# EAGLE board client_pcb_board (EAGLE 9.6.2)
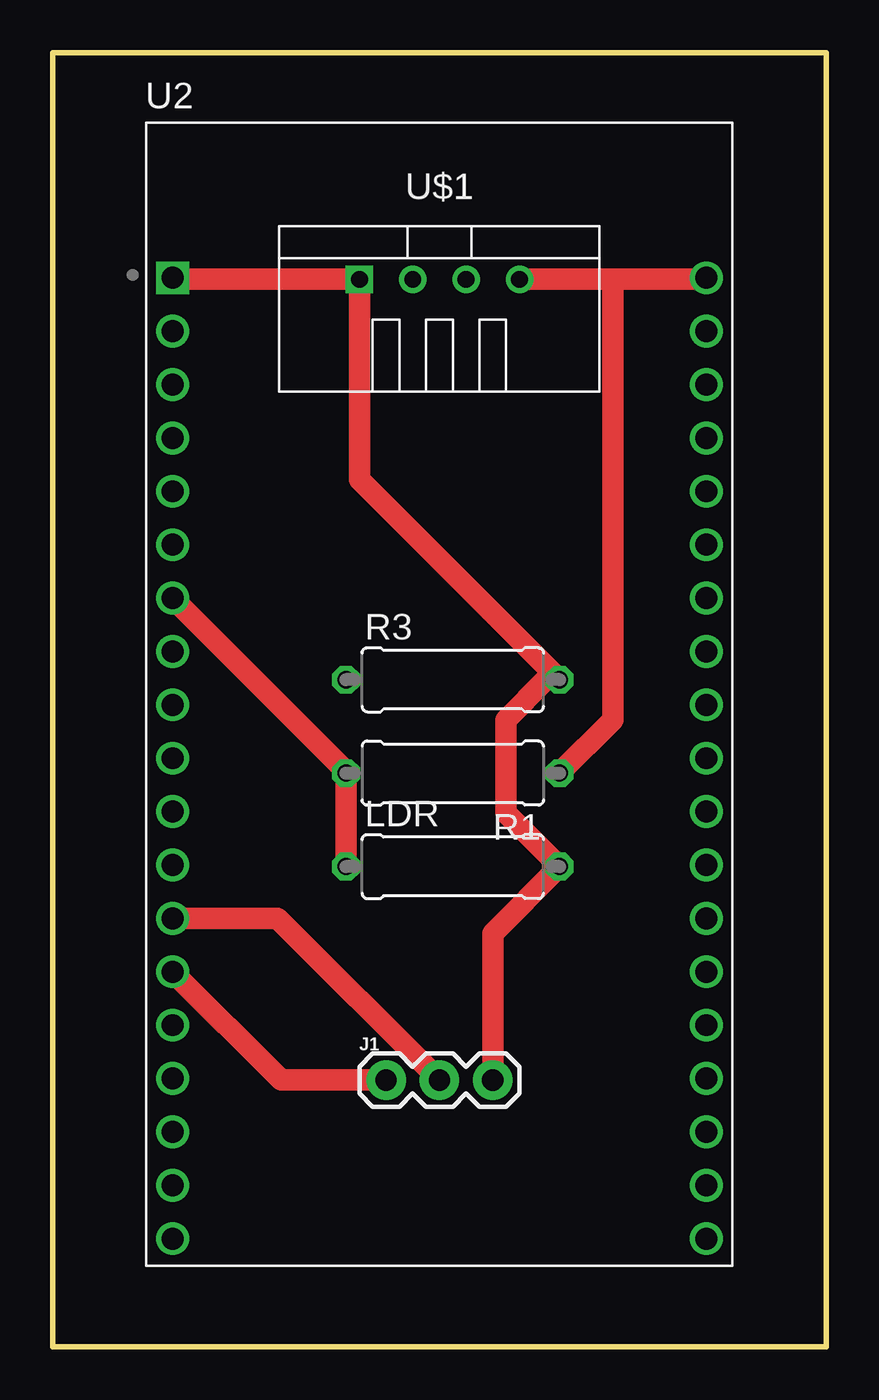
[diagram p0: board, top side]
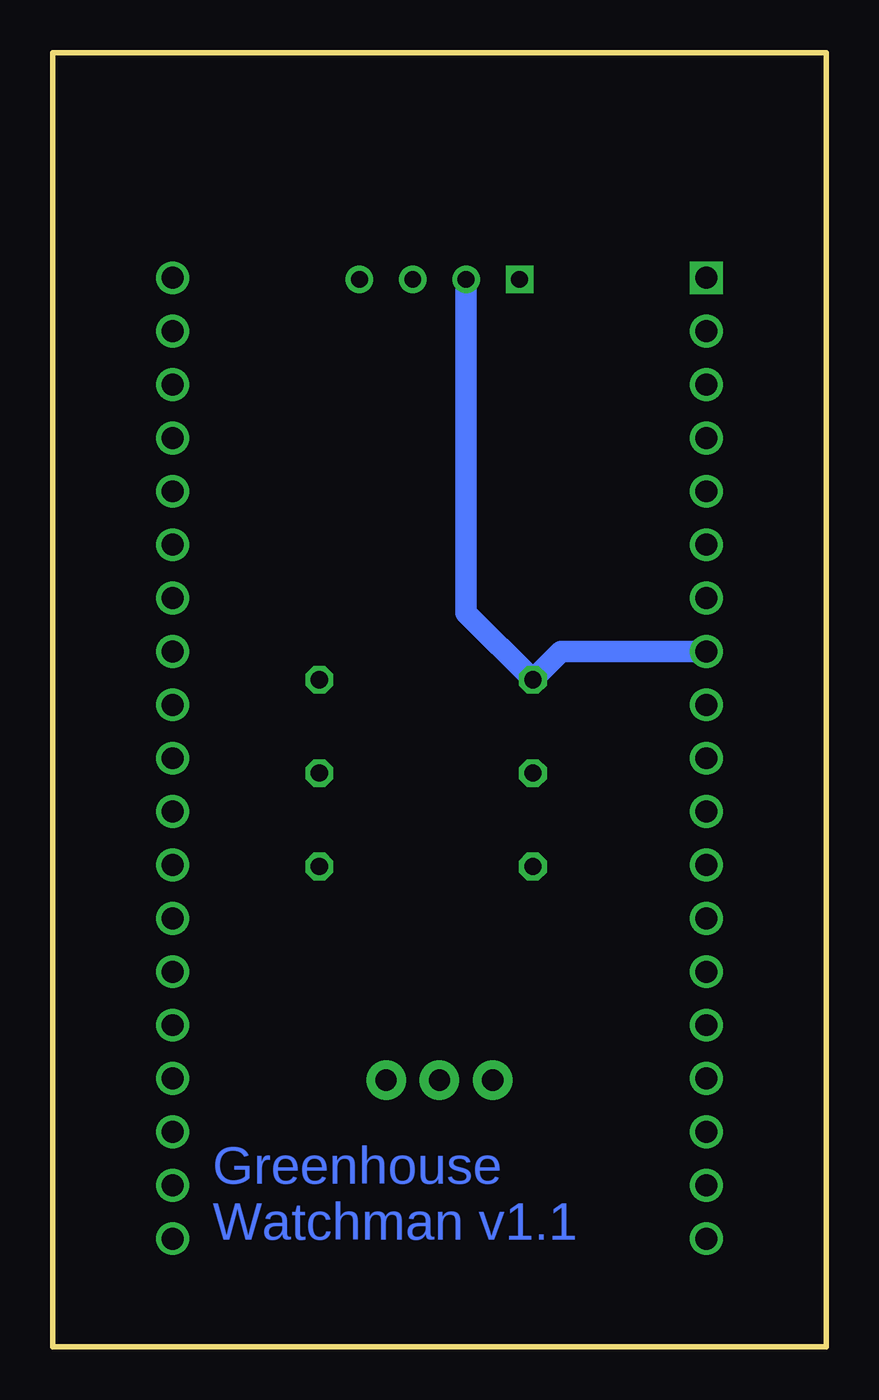
[diagram p1: board, bottom side, seen from below]

Size 36.83 x 61.59 mm. Coordinates in mm from the lower left corner, seen from the top.
Outline: 0,61.59 36.83,61.59 36.83,0 0,0 0,61.59
Copper layers (1*16): Top 0.035mm / dielectric 1.5mm / Bottom 0.035mm
Design rules "default": minimum track width 6mil, minimum drill 0.35mm, track to track 6mil, track to pad 6mil, pad to pad 6mil, via to via 6mil, smd to smd 6mil, copper to edge 40mil, drill to drill 6mil, minimum pad ring 10mil, minimum via ring 8mil, stop-mask expansion 4mil, vias tented up to drill 0mil, thermal gap 10mil

## Footprints (pad centres in the part's own frame; a part is rotated, then mirrored left to right if it is on the bottom)
1X03 = drill 1.016 pad 1.88: 1 0,0; 2 2.54,0; 3 5.08,0
0309/10 = drill 0.813 octagon: 1 -5.08,0; 2 5.08,0
MODULE_ESP32-DEVKITC-32D = drill 1.04 square: 1 -12.7,19.76 | drill 1.04: 2 -12.7,17.22; 3 -12.7,14.68; 4 -12.7,12.14; 5 -12.7,9.6; 6 -12.7,7.06; 7 -12.7,4.52; 8 -12.7,1.98; 9 -12.7,-0.56; 10 -12.7,-3.1; 11 -12.7,-5.64; 12 -12.7,-8.18; 13 -12.7,-10.72; 14 -12.7,-13.26; 15 -12.7,-15.8; 16 -12.7,-18.34; 17 -12.7,-20.88; 18 -12.7,-23.42; 19 -12.7,-25.96; 20 12.7,19.76; 21 12.7,17.22; 22 12.7,14.68; 23 12.7,12.14; 24 12.7,9.6; 25 12.7,7.06; 26 12.7,4.52; 27 12.7,1.98; 28 12.7,-0.56; 29 12.7,-3.1; 30 12.7,-5.64; 31 12.7,-8.18; 32 12.7,-10.72; 33 12.7,-13.26; 34 12.7,-15.8; 35 12.7,-18.34; 36 12.7,-20.88; 37 12.7,-23.42; 38 12.7,-25.96
TEMP-HUM-SENSOR-DHT22 = drill 0.8 square: 1 -3.81,0 | drill 0.8: 2 -1.27,0; 3 1.27,0; 4 3.81,0

## Placement (x,y rotation side)
J1  [1X03]  15.88,12.7 0 top
LDR  [0309/10]  19.05,22.86 0 top
R1  100  [0309/10]  19.05,27.3 180 top
R3  [0309/10]  19.05,31.75 0 top
U2  ESP32-DEVKITC-32D  [MODULE_ESP32-DEVKITC-32D]  18.41,31.11 0 top
U$1  TEMP-HUM-SENSOR-DHT22  [TEMP-HUM-SENSOR-DHT22]  18.41,50.8 0 top

## Library data of the parts
J1 = SparkFun-Connectors
LDR R1 R3 = rcl; SPICEPREFIX: R
U2 = ESP32-DEVKITC-32D; AVAILABILITY: In Stock; DESCRIPTION: WiFi Development Tools (802.11) ESP32 General Development Kit, ESP32-WROOM-32D on the board; MF: Espressif Systems; MP: ESP32-DEVKITC-32D; PACKAGE: None; PRICE: None
U$1 = diy-modules

## Nets
EXT_5V: U2.19
GND2: U2.26
N$1: J1.3 LDR.2 R3.2 U2.1 U$1.1
N$2: J1.1 U2.14
N$3: R3.1 U2.8 U$1.2
N$4: J1.2 U2.13
N$6: R1.1 U2.20 U$1.4
N$8: LDR.1 R1.2 U2.7

## Tracks (layer width: path | path; a pad name or v marks a point on that pad's centre or on a via)
N$1
  Top 1.016: J1.3 20.95,19.68 LDR.2 21.59,25.4 21.59,29.84 23.5,31.75 R3.2 14.61,41.27 U$1.1 5.79,50.8 U2.1
N$2
  Top 1.016: J1.1 10.87,12.7 U2.14
N$3
  Bottom 1.016: U$1.2 17.14,34.93 R3.1 12.62,33.09 U2.8
N$4
  Top 1.016: J1.2 10.72,20.39 U2.13
N$6
  Top 1.016: R1.1 26.67,29.84 26.67,50.8 | 26.67,50.8 U$1.4 | U2.20 31.04,50.8 26.67,50.8
N$8
  Top 1.016: LDR.1 R1.2 13.97,27.38 U2.7

## Text on the board
Bottom: Greenhouse / Watchman v1.1